# EAGLE board SerLCD_20x4_WT-v01 (EAGLE 7.6.0)

Size 101.6 x 124.46 mm. Coordinates in mm from the lower left corner, seen from the top.
Outline: 2.54,0 arc-90 0,2.54 0,121.92 arc-90 2.54,124.46 7.62,124.46 7.62,0 2.54,0
Outline: 10.16,124.46 91.44,124.46 arc-90 93.98,121.92 93.98,119.38 arc90 96.52,116.84 99.06,116.84 arc-90 101.6,114.3 101.6,10.16 arc-90 99.06,7.62 96.52,7.62 arc90 93.98,5.08 93.98,2.54 arc-90 91.44,0 10.16,0 10.16,124.46
Outline: 81.79,111 29.46,111 29.46,12.19 81.79,12.19 81.79,111
Copper layers (1*16): Top 0.035mm / dielectric 1.5mm / Bottom 0.035mm
Design rules "SparkFun-2-layer-TIGHT *": minimum track width 10mil, minimum drill 15mil, track to track 7mil, track to pad 7mil, pad to pad 7mil, via to via 7mil, smd to smd 7mil, copper to edge 7mil, drill to drill 7mil, minimum pad ring 7mil, minimum via ring 7mil, stop-mask expansion 4mil, vias tented up to drill 25mil, thermal gap 10mil
Net classes: 1 vcc1: width 0.203 mm; 3 VCC2: width 0.381 mm, drill 0.508 mm, clearance 0.254 mm to class 0; 8 eight_mil: width 0.203 mm, clearance 0.127 mm; 9 twelve_mil: width 0.305 mm, clearance 0.127 mm; 10 twenty_mil: width 0.508 mm, clearance 0.127 mm; 11 thirty_mil: width 0.762 mm, clearance 0.127 mm; 13 20_mil: width 0.508 mm, drill 0.508 mm

## Footprints (pad centres in the part's own frame; a part is rotated, then mirrored left to right if it is on the bottom)
GOLD_HINGE_HS+WT = hole 2.794: 14.224,4.077; 14.224,15.07; 3.81,4.077; 3.81,15.07

## Placement (x,y rotation side)
U$1  [SER_LCD_20X4_REF_ONLY]  85.09,12.7 90 top
U$6  GOLD_HINDGEHS+WT  [GOLD_HINGE_HS+WT]  0,105.41 0 top
U$7  GOLD_HINDGEHS+WT  [GOLD_HINGE_HS+WT]  0,0 0 top

## Library data of the parts
U$1 = SerLCD_dimensions
U$6 U$7 = Testing

## Text on the board
Bottom: v01 (11/15/2016) Plewis
Dimension: ROUTE OUT | ROUTE OUT | ROUTE OUT
tPlace: WT | Serial LCD 20x4 | #580